# Altium PCB Mixed Signal Board Project.PcbDoc (part 2 of 3)
Units mm, origin at the board's own origin, x right, y up, seen from the top; angles counter-clockwise.
Board outline 70.64 x 70.03 mm, 4 copper layers (Top Layer, GND, VCC, Bottom Layer), stack 1.565 mm thick; 188 components, 143 nets, 738 pads, 458 vias.
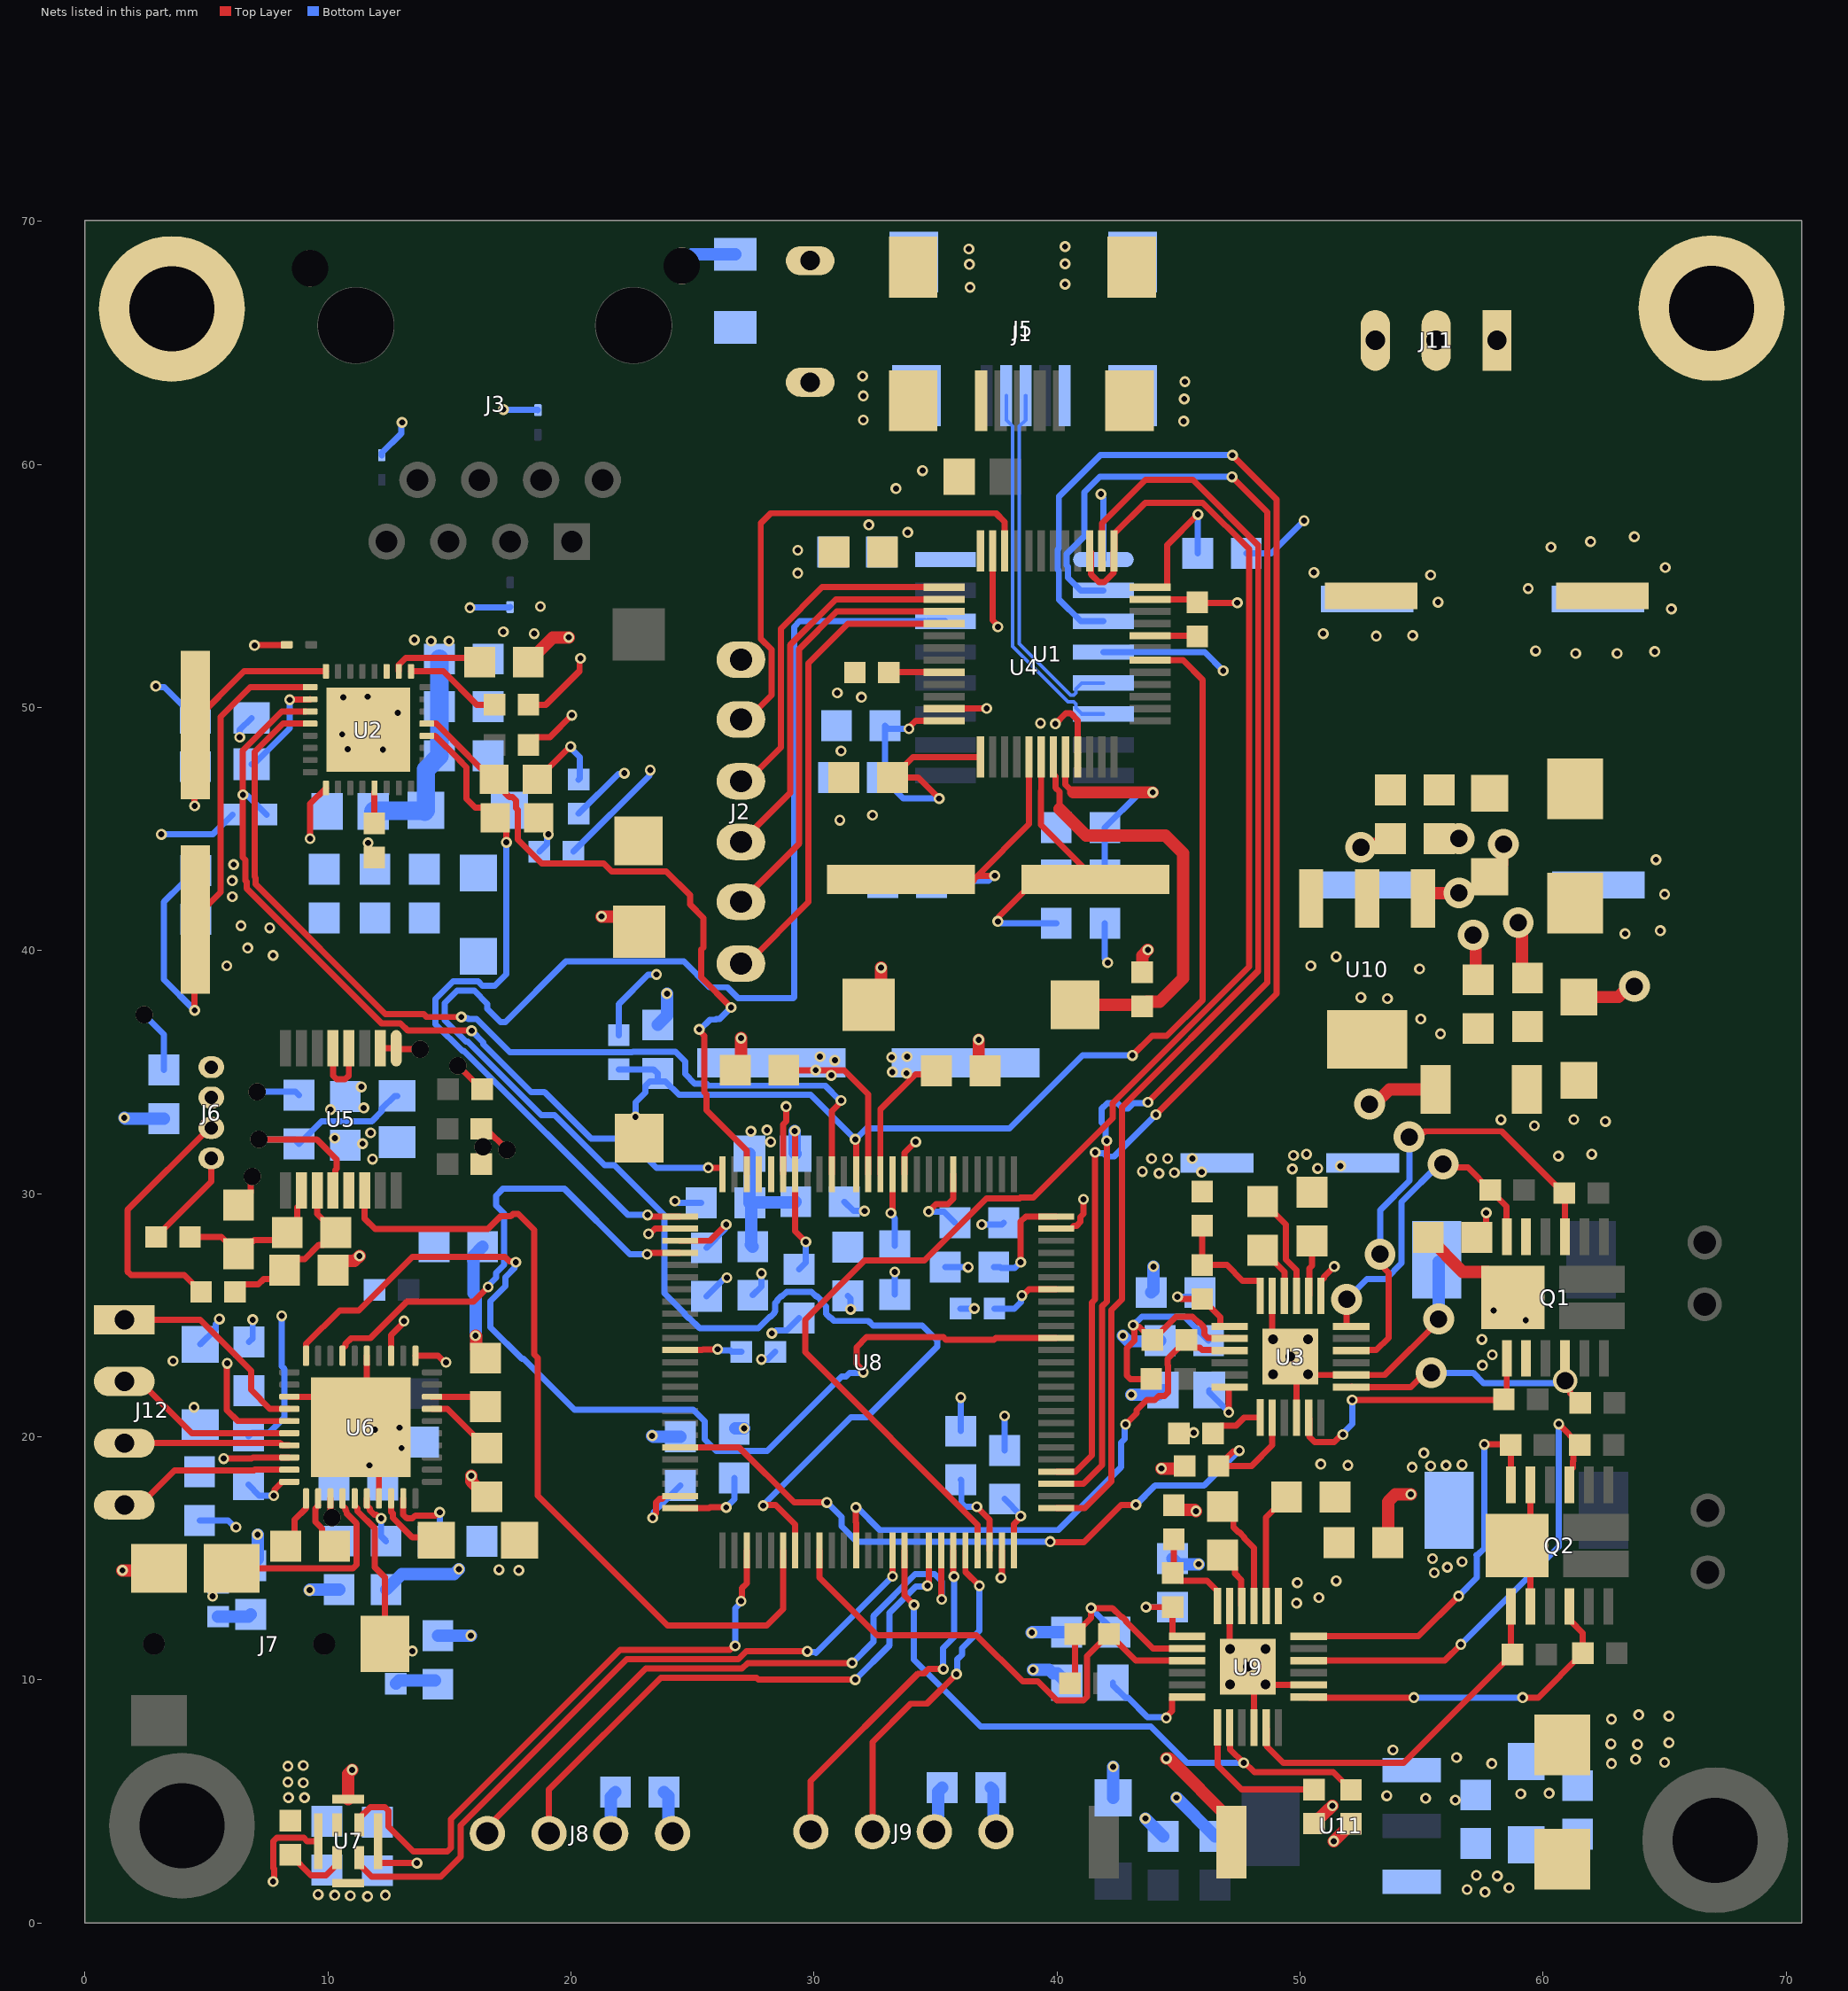
[diagram p4: the nets of this part, all layers, seen from the top]

## Via types
v1: diameter 0.45, hole 0.25, Top Layer to Bottom Layer, tented both sides, 409 vias
v2: diameter 1.27, hole 0.711, Top Layer to Bottom Layer, tented both sides, 15 vias
v3: diameter 0.45, hole 0.25, Top Layer to Bottom Layer, 14 vias
v4: diameter 0.8, hole 0.4, Top Layer to Bottom Layer, tented both sides, 10 vias
v5: diameter 0.711, hole 0.711, Top Layer to Bottom Layer, tented both sides, 9 vias
v6: diameter 1, hole 0.711, Top Layer to Bottom Layer, tented both sides, 1 vias

## Nets (pads, with @x,y where several pads share a name; then routed paths per layer and width w, separated by ;. In a path a pad name is that pad's centre, name@x,y a point inside that pad or via, vN(x,y) a via of type N, cw(c..) or ccw(c..) an arc to the next point about the centre after c; other vN are vias at no path point) (continued)
+3V3: C1.2 C2.2 C3.2 C5.2 C7.2 C8.2 C9.2 C16.2 C17.2 C18.2 C19.2 C28.2 C29.2 C31.2 C44.2 C45.2 C46.2 C47.2 C52.2 C53.2 C54.2 C55.2 C59.2 C60.2 C61.2 C62.2 C63.2 C64.2 C71.2 C81.2 C82.1 C83.2 D6.K FB1.1 FB2.1 FB4.1 J6.3 J8.3 J9.3 R2.2 R3.1 R5.2 R8.1 R9.2 R10.2 R20.1 R25.2 R26.2 R27.1 R32.2 R33.1 R35.2 R44.1 U1.1 U1.9 U1.24 U1.36 U1.48 U2.17 U4.4 U4.16 U5.13 U6.5 U6.8 U6.33 U7.1 U8.6 U8.11 U8.19 U8.28 U8.50 U8.75 U8.100 U10.2 U10.4 | length 90.3
  Top Layer w0.254: v1(5.715,19.101) 6.866,19.101 6.911,19.146 U6.8@8.419,19.146 ; v1(5.863,23.02) 5.85,23.007 5.85,21.099 6.303,20.646 U6.5@8.419,20.646 ; v1(9.271,44.602) 9.271,46.034 U2.17@9.922,46.685 ; v1(11.659,44.428) 11.659,44.082 R9.2@11.913,43.828 ; U6.33@12.604,23.624 12.604,24.182 13.132,24.71 v1(13.132,24.759) ; v5(15.347,35.261) 15.374,35.261 R27.1@16.345,34.29 ; R25.2@16.32,31.217 16.383,31.28 v5(16.383,31.928) ; R26.2@16.32,32.664 16.509,32.664 17.372,31.801 v5(17.374,31.801) ; R5.2@18.253,48.463 18.571,48.781 19.139,48.781 v1(20.041,49.682) ; R8.1@18.253,50.114 18.974,50.114 20.359,51.499 20.359,51.982 v1(20.396,52.019) ; U8.50@24.495,17.063 25.687,17.063 25.718,17.094 v1(26.391,17.094) ; U8.28@24.495,28.063 25.726,28.063 v1(26.391,28.727) ; v1(29.212,32.577) 29.233,32.556 29.233,28.451 v1(29.667,28.016) ; v1(33.166,29.204) 33.166,29.257 33.233,29.323 U8.11@33.233,30.801 ; v1(33.909,49.124) 33.909,49.174 34.182,49.447 U1.48@35.361,49.447 ; v1(34.722,29.261) 35.027,29.566 35.509,29.566 35.733,29.789 U8.6@35.733,30.801 ; v1(35.154,46.253) 34.29,47.117 C3.2@33.233,47.117 34.075,47.959 U1.1@36.849,47.959 ; U8.75@38.233,15.325 38.233,16.412 38.506,16.686 v1(38.506,16.739) ; v1(38.506,27.178) 38.506,28.854 38.715,29.063 U8.100@39.971,29.063 ; v1(39.931,49.327) 40.358,49.754 40.568,49.754 40.849,49.474 U1.9@40.849,47.959 ; U1.24@43.837,54.947 44.512,54.947 44.535,54.97 44.535,56.676 v1(45.798,57.939) ; R20.1@45.022,20.142 45.047,20.168 v1(45.622,20.168)
  Top Layer w0.508: R3.1@43.51,39.103 43.51,39.791 43.739,40.02 v1(43.739,40.03) ; R44.1@50.571,4.089 51.143,4.661 51.174,4.661 v1(51.333,4.82)
  Bottom Layer w0.254: v1(3.15,44.78) 5.27,44.78 R10.2@6.083,45.593 ; R35.2@21.971,36.513 21.971,37.795 23.181,39.005 23.511,39.005 v1(23.52,39.014) ; C62.2@25.578,27.772 26.353,28.547 26.353,28.69 v1(26.391,28.727) ; v1(26.391,17.094) 26.721,17.424 C61.2@26.721,18.304 ; C63.2@29.388,26.883 29.667,27.162 v1(29.667,28.016) ; v1(33.166,29.204) 33.166,29.151 33.325,28.992 C64.2@33.325,27.848 ; v1(33.909,49.124) 33.055,49.124 C1.2@32.928,49.251 32.928,47.235 C2.2@32.81,47.117 33.674,46.253 v1(35.154,46.253) ; v1(34.722,29.261) 35.347,29.261 C71.2@35.805,28.804 ; C59.2@37.398,26.975 37.668,26.975 37.694,26.949 38.267,26.949 38.496,27.178 v1(38.506,27.178) ; C60.2@37.846,17.44 38.506,16.78 v1(38.506,16.739) ; U4.4@41.909,52.274 46.075,52.274 v1(46.838,51.511) ; C9.2@45.787,56.337 45.798,56.348 v1(45.798,57.939)
  Bottom Layer w0.508: v1(1.626,33.122) 1.66,33.087 C29.2@3.251,33.087 ; J8.3@21.641,3.683 21.641,5.191 C55.2@21.835,5.385 ; v1(29.212,32.577) 29.212,31.682 FB4.1@29.246,31.648 ; J9.3@34.95,3.759 35.111,3.92 35.111,5.402 C54.2@35.271,5.563
  other v1: 8.382,5.156 9.042,5.156 8.992,5.766 8.357,5.791 8.357,6.452 8.992,6.477 4.496,21.209 3.632,23.114 11.836,31.42 60.63,31.547 62.001,31.623 11.43,32.055 11.76,32.501 59.639,32.791 62.56,32.969 58.268,33.043 61.265,33.045 6.071,42.215 6.067,42.875 6.125,43.536 39.319,49.352 33.858,57.201 32.258,57.509 33.376,59.004 34.468,59.741
  other v3: 10.287,32.283 55.778,36.576 54.966,37.186 53.594,38.024 52.502,38.075
+12V: C22.1 C24.2 C25.1 C72.1 C74.2 C78.1 C79.1 C80.1 D5.A D7.A J11.1 Q1.2 Q1.11 Q1.15 Q2.2 Q2.11 Q2.15 U3.1 U9.1 | length 11.4
  Top Layer w0.254: U3.1@50.856,25.792 50.856,26.392 50.981,26.517 50.981,26.572 v1(51.41,27) ; Q2.2@59.481,13.019 59.481,14.969 Q2.15@58.931,15.519 59.481,16.069 Q2.11@59.481,18.019
  Top Layer w0.508: C24.2@55.277,28.194 56.695,26.776 57.707,26.776 Q1.15@58.753,25.73
  other v1: 62.814,6.553 64.999,6.604 63.805,6.731 63.881,7.341 62.789,7.366 65.176,7.417 62.814,8.382 65.176,8.509 63.932,8.56 49.86,13.157 50.775,13.386 49.886,13.995 51.486,14.072 56.058,14.63 56.667,14.859 51.968,18.821 50.851,18.872 57.506,22.936 57.912,23.368 57.48,24.003 59.284,24.79 57.963,25.197 49.682,31.013 50.724,31.039 51.664,31.14 49.733,31.572 50.267,31.623 63.373,40.691 64.821,40.818 64.999,42.316 64.643,43.739 61.341,52.222 63.043,52.222 64.592,52.299 59.69,52.324 65.278,54.051 59.385,54.889 65.024,55.753 60.325,56.591 61.951,56.82 63.754,57.023
  other v3: 55.524,14.402 55.448,14.986
AIN0: J6.2 R28.2 | length 10.8
  Top Layer w0.254: R28.2@4.788,25.959 4.095,26.652 1.901,26.652 1.753,26.8 1.753,29.325 5.132,32.704 J6.2@5.207,32.704
AIN1: J6.1 R29.2 | length 4.2
  Top Layer w0.254: R29.2@2.896,28.219 R29.2@2.934,28.219 5.207,30.493 J6.1@5.207,31.454
CAN_RX: J9.1 U8.70 | length 14.5
  Top Layer w0.254: J9.1@29.87,3.759 29.87,5.846 34.283,10.258 34.529,10.258 34.714,10.444 v1(35.327,10.444) ; U8.70@35.733,15.325 35.733,14.28 v1(35.763,14.249)
  Bottom Layer w0.254: v1(35.327,10.444) 35.309,10.462 35.309,11.306 35.763,11.76 v1(35.763,14.249)
CAN_TX: J9.2 U8.71 | length 14
  Top Layer w0.254: J9.2@32.41,3.759 32.41,7.448 33.981,9.019 34.647,9.019 v1(35.865,10.236) ; U8.71@36.233,15.325 36.233,14.44 v1(36.805,13.868)
  Bottom Layer w0.254: v1(35.865,10.236) 35.9,10.271 35.9,10.842 36.096,11.038 36.096,11.306 36.805,12.014 v1(36.805,13.868)
CH340_RST: U4.14 U8.57 | length 81.4
  Top Layer w0.254: v1(27.915,17.164) 27.947,17.196 28.423,17.196 29.233,16.386 U8.57@29.233,15.325
  Bottom Layer w0.254: v1(27.915,17.164) 27.915,17.196 31.521,20.803 32.169,20.803 35.074,23.707 35.074,23.956 34.452,24.578 32.427,24.578 32.24,24.765 30.836,24.765 30.692,24.908 30.654,24.908 30.505,25.057 30.505,25.356 30.277,25.585 30.277,25.623 30.128,25.772 30.09,25.772 29.903,25.959 28.873,25.959 28.686,25.772 28.648,25.772 28.499,25.623 28.499,25.585 28.41,25.496 28.41,25.159 28.372,25.12 28.372,25.082 28.223,24.933 28.185,24.933 27.712,24.46 25.298,24.46 24.876,24.883 24.838,24.883 24.689,25.031 24.689,25.07 23.851,25.908 23.851,29.11 21.793,31.167 21.389,31.167 19.331,33.224 18.784,33.224 15.757,36.251 15.691,36.251 14.812,37.131 14.812,37.843 15.316,38.347 16.028,38.347 16.564,37.811 16.564,37.6 17.1,37.063 17.311,37.063 19.794,39.546 24.644,39.546 25.703,38.488 26.438,38.488 26.876,38.049 29.159,38.049 29.185,38.075 29.185,53.315 29.414,53.544 34.569,53.544 34.62,53.492 34.671,53.544 U4.14@35.409,53.544
CH340_RXD: U4.3 U8.79 | length 61.8
  Top Layer w0.254: U8.79@39.971,18.563 40.763,18.563 41.434,19.234 41.434,25.513 41.569,25.648 v1(41.569,31.697) ; v1(44.069,33.249) 49.041,38.22 49.041,58.554 v1(47.219,60.376)
  Bottom Layer w0.254: v1(41.569,31.697) 41.607,31.66 41.915,31.66 42.048,31.527 42.347,31.527 v1(44.069,33.249) ; U4.3@41.909,53.544 40.976,53.544 40.078,54.442 40.078,55.635 40.024,55.689 40.024,56.478 40.078,56.532 40.078,58.67 41.783,60.376 v1(47.219,60.376)
CH340_TXD: U4.2 U8.78 | length 59.5
  Top Layer w0.254: U8.78@39.971,18.063 41.089,18.063 41.853,18.827 41.853,25.367 42.048,25.563 42.048,32.17 v1(42.046,32.173) ; v1(43.739,33.757) 48.66,38.677 48.66,58.028 v1(47.2,59.488)
  Bottom Layer w0.254: U4.2@41.909,54.814 40.976,54.814 40.459,55.331 40.459,55.793 40.405,55.847 40.405,56.32 41.124,57.04 41.124,58.854 41.759,59.488 v1(47.2,59.488) ; v1(42.046,32.173) 42.008,32.211 42.008,32.741 41.834,32.915 41.834,33.495 42.068,33.729 42.487,33.729 42.715,33.5 42.926,33.5 43.144,33.719 43.701,33.719 v1(43.739,33.757)
CH340USB_D_N: J5.2 U4.6 | length 15.4
  Bottom Layer w0.15: J5.2@37.912,62.826 37.912,61.826 38.173,61.564 38.173,52.505 40.449,50.23 40.688,50.23 40.775,50.142 40.775,49.976 41.018,49.734 U4.6@41.909,49.734
CH340USB_D_P: J5.3 U4.5 | length 15
  Bottom Layer w0.15: J5.3@38.712,62.826 38.712,61.826 38.45,61.564 38.45,52.62 40.563,50.507 40.688,50.507 40.775,50.595 40.775,50.761 41.018,51.004 U4.5@41.909,51.004
CLK_MIC: U7.3 U8.65 | length 29.4
  Top Layer w0.254: U7.3@11.289,2.692 11.362,2.619 11.362,2.344 11.801,1.905 14.648,1.905 15.466,2.723 15.468,2.725 15.468,4.013 22.301,10.846 26.887,10.846 27.214,11.172 v1(29.725,11.172) ; v1(33.233,14.259) U8.65@33.233,15.325
  Bottom Layer w0.254: v1(29.725,11.172) 29.763,11.135 30.052,11.135 30.081,11.107 v1(33.233,14.259)
COL: DS1.A U2.28 U8.26 | length 28.6
  Top Layer w0.254: U2.28@14.245,48.833 14.417,48.833 15.388,47.862 15.388,47.856 15.703,47.54 15.703,46.247 16.072,45.878 16.479,45.878 DS1.A@16.891,45.466 ; v1(17.348,44.45) DS1.A@17.348,45.009 ; v1(23.158,29.125) 23.211,29.125 23.273,29.063 U8.26@24.495,29.063
  Bottom Layer w0.254: v1(17.348,44.45) 17.348,39.029 16.869,38.549 16.365,38.549 16.186,38.728 15.158,38.728 14.431,38.001 14.431,36.973 15.533,35.87 15.599,35.87 22.345,29.125 v1(23.158,29.125)
CRS: DS2.A U2.29 U8.23 | length 28.4
  Top Layer w0.254: U2.29@14.245,49.333 14.456,49.333 15.769,48.02 15.769,48.013 16.268,47.514 16.367,47.514 16.791,47.09 16.791,46.991 16.89,46.991 17.313,46.568 17.313,46.469 17.462,46.32 17.596,46.32 17.745,46.171 17.745,45.857 17.815,45.787 17.815,44.567 18.796,43.586 21.348,43.586 21.679,43.256 23.924,43.256 24.9,42.279 24.9,41.896 25.449,41.347 25.449,40.122 25.365,40.038 25.365,38.891 26.591,37.665 v1(26.591,37.657) ; v1(25.277,36.758) 25.277,36.705 25.492,36.49 25.492,34.179 25.585,34.087 25.585,33.425 27.233,31.777 U8.23@27.233,30.801
  Bottom Layer w0.254: v1(25.277,36.758) 25.33,36.758 25.73,37.158 25.956,37.158 25.984,37.185 26.119,37.185 v1(26.591,37.657)
DOUT_MIC: U7.4 U8.53 | length 25.4
  Top Layer w0.254: U7.4@11.289,4.042 11.289,4.317 11.743,4.771 12.344,4.771 12.493,4.623 12.493,3.967 13.516,2.943 14.913,2.943 15.062,3.092 15.062,4.267 22.022,11.227 26.538,11.227 26.707,11.396 v1(26.76,11.396) ; v1(27,13.237) 27.038,13.275 27.038,13.775 27.233,13.97 U8.53@27.233,15.325
  Bottom Layer w0.254: v1(26.76,11.396) 26.76,12.944 27,13.184 v1(27,13.237)
DRDY: U5.14 U8.56 | length 34.8
  Top Layer w0.254: U5.14@11.514,30.129 11.514,28.973 11.942,28.545 16.586,28.545 17.124,29.083 17.533,29.083 17.622,29.172 17.832,29.172 18.491,28.513 18.491,23.396 18.644,23.243 18.644,17.569 23.984,12.229 28.053,12.229 28.733,12.908 U8.56@28.733,15.325
DVDD: C27.2 R15.2 R16.2 U3.8 | length 12.1
  Top Layer w0.254: v1@43.091,24.524 43.383,24.524 R16.2@43.929,23.978 44.894,24.943 45.571,24.943 45.838,24.676 45.876,24.676 46.025,24.527 46.025,24.489 46.063,24.45 46.063,24.214 46.212,24.065 47.083,24.065 U3.8@47.106,24.042 ; v1(43.136,24.592) 43.173,24.554 43.173,24.375 43.192,24.356 43.192,23.959 42.87,23.638 42.87,22.516 43.019,22.367 43.868,22.367 R15.2@43.878,22.377
  Bottom Layer w0.254: v1(43.136,24.592) 43.487,24.943 45.247,24.943 C27.2@46.237,23.952
DVDD_2: C77.2 R39.2 R40.2 U9.8 | length 9.5
  Top Layer w0.254: R39.2@40.538,9.855 40.742,10.058 R40.2@40.742,11.887 41.402,12.548 v1(41.402,12.954) 42.282,12.954 42.65,12.586 42.688,12.586 42.837,12.437 42.837,12.399 43.945,11.291 U9.8@45.354,11.291
  Bottom Layer w0.254: v1(41.402,12.954) C77.2@42.393,11.963
EARTH: C21.1 J11.2 MH1.1 MH4.1 R12.2
EN: R22.2 U3.14 U8.45 | length 31.3
  Top Layer w0.254: U8.45@24.495,19.563 26.919,19.563 29.186,17.296 v1(30.531,17.297) v1(30.531,17.297) ; v1(39.724,15.684) 39.751,15.657 41.108,15.657 42.643,17.193 43.239,17.193 v3(43.249,17.203) ; R22.2@46.609,18.771 46.609,18.834 R22.2@46.647,18.796 ; v3(47.498,19.431) 47.46,19.393 47.245,19.393 R22.2@46.647,18.796 ; U3.14@48.856,20.788 48.856,19.646 48.006,18.796 R22.2@46.647,18.796
  Bottom Layer w0.254: v1(30.531,17.297) 31.132,16.696 31.132,16.319 31.768,15.684 v1(39.724,15.684) ; v3(43.249,17.203) 44.033,17.987 46.054,17.987 v3(47.498,19.431)
EN_2: R46.2 U8.66 U9.14 | length 26.6
  Top Layer w0.254: U8.66@33.733,15.325 33.733,13.481 34.116,13.097 v1(34.116,13.082) ; U9.14@47.104,8.037 47.127,8.014 47.127,7.139 v1(47.681,6.584) ; v1@47.691,6.652 47.691,6.628 48.121,6.198 51.372,6.198 R46.2@52.095,5.474
  Bottom Layer w0.254: v1(34.116,13.082) 34.112,13.078 34.112,10.826 36.86,8.079 43.862,8.079 45.357,6.584 v1(47.681,6.584)
EXT_UART_RX: J8.1 U8.69 | length 26.8
  Top Layer w0.254: J8.1@16.561,3.683 16.561,3.937 23.089,10.465 27.045,10.465 27.274,10.693 v1(31.572,10.693) ; U8.69@35.233,15.325 35.233,13.332 v1(35.255,13.31)
  Bottom Layer w0.254: v1(31.572,10.693) 32.442,11.563 32.442,12.624 34.169,14.351 34.966,14.351 35.255,14.062 v1(35.255,13.31)
EXT_UART_TX: J8.2 U8.68 | length 23.2
  Top Layer w0.254: J8.2@19.101,3.683 19.101,5.486 23.698,10.084 27.634,10.084 27.71,10.008 v1(31.699,10.008) ; v1(34.671,13.872) 34.733,13.933 U8.68@34.733,15.325
  Bottom Layer w0.254: v1(31.699,10.008) 33.115,11.423 33.115,12.758 34.191,13.834 34.633,13.834 v1(34.671,13.872)
GH1: Q1.1 R17.2 U3.17 | length 12
  Top Layer w0.254: U3.17@50.356,20.788 50.379,20.765 50.379,20.006 50.601,19.784 51.405,19.784 51.712,20.091 v3(51.765,20.091) ; v3(52.146,21.51) 58.353,21.51 R17.2@58.382,21.539 58.503,21.66 Q1.1@58.503,23.23
  Bottom Layer w0.254: v3(51.765,20.091) 51.765,20.144 52.146,20.525 v3(52.146,21.51)
GH1_2: Q2.1 R41.2 U9.17 | length 15
  Top Layer w0.254: U9.17@48.604,8.037 48.627,8.014 48.627,7.253 49.301,6.579 54.267,6.579 R41.2@58.737,11.049 58.681,11.106 Q2.1@58.681,13.019
GH2: Q1.12 R19.2 U3.24 | length 13.6
  Top Layer w0.254: v2(51.918,25.654) 51.918,24.565 51.941,24.542 U3.24@52.106,24.542 ; v2(55.884,31.217) 56.028,31.073 56.9,31.073 R19.2@57.823,30.15 58.496,29.477 58.496,28.237 Q1.12@58.503,28.23
  Bottom Layer w0.254: v2(51.918,25.654) 52.758,26.494 53.532,26.494 54.178,27.14 54.178,29.662 55.733,31.217 v2(55.884,31.217)
GH2_2: Q2.12 R43.2 U9.24 | length 16.2
  Top Layer w0.254: U9.24@50.354,11.791 54.865,11.791 v1(56.523,13.449) ; v1(57.582,19.685) 58.655,19.685 58.681,19.66 Q2.12@58.681,18.019
  Bottom Layer w0.254: v1(56.523,13.449) 57.279,14.204 57.279,15.052 ; 57.255,15.126 57.299,15.126 57.582,15.408 v1(57.582,19.685)
GL1: Q1.4 R21.2 U3.19 | length 11.4
  Top Layer w0.254: U3.19@52.129,22.065 52.106,22.065 52.129,22.042 54.55,22.042 55.14,22.631 v2(55.397,22.631) ; v6(60.903,22.298) Q1.4@60.903,23.23 ; v6@60.933,22.328 60.933,22.066 61.108,21.891 61.108,21.81 R21.2@61.531,21.387
  Bottom Layer w0.254: v2(55.397,22.631) 57.12,22.631 57.546,22.205 60.81,22.205 v6(60.903,22.298)
GL1_2: Q2.4 R45.2 U9.19 | length 14.2
  Top Layer w0.254: U9.19@50.354,9.291 50.377,9.268 v1(54.683,9.268) ; v1(59.16,9.268) 59.801,9.268 R45.2@61.633,11.1 61.633,11.925 61.162,12.396 61.154,12.396 61.081,12.469 Q2.4@61.081,13.019
  Bottom Layer w0.254: v1(54.683,9.268) v1(59.16,9.268)
GL2: Q1.9 R24.2 U3.22 | length 20
  Top Layer w0.254: U3.22@52.104,23.54 U3.22@52.106,23.542 52.129,23.565 53.141,23.565 53.643,24.067 53.643,26.741 53.484,26.901 53.484,27.314 v2(53.289,27.508) ; v2(54.485,32.332) 54.68,32.526 55.104,32.526 55.142,32.564 58.291,32.564 60.516,30.34 60.554,30.34 R24.2@60.871,30.023 60.903,29.991 Q1.9@60.903,28.23
  Bottom Layer w0.254: v2(53.289,27.508) 53.292,27.511 53.292,29.32 54.504,30.532 54.504,32.313 v2(54.485,32.332)
GL2_2: Q2.9 R48.2 U9.22 | length 20.3
  Top Layer w0.254: U9.22@50.354,10.791 55.952,10.791 v1(56.617,11.455) ; v1(60.642,20.523) R48.2@61.506,19.66 61.243,19.397 61.243,19.003 61.233,18.992 61.233,18.721 61.081,18.569 Q2.9@61.081,18.019
  Bottom Layer w0.254: v1(56.617,11.455) 60.642,15.481 v1(60.642,20.523)
GND: C1.1 C2.1 C3.1 C4.1 C5.1 C6.1 C7.1 C8.1 C9.1 C10.1 C11.1 C12.1 C13.1 C14.1 C15.1 C16.1 C17.1 C18.1 C19.1 C20.1 C24.1 C25.2 C26.1 C27.1 C28.1 C29.1 C30.1 C31.1 C33.2 C34.2 C35.1 C36.1 C37.1 C38.2 C39.1 C40.1 C41.2 C43.2 C44.1 C45.1 C46.1 C47.1 C48.1 C49.1 C50.2 C51.2 C52.1 C53.1 C54.1 C55.1 C56.1 C57.1 C58.1 C59.1 C60.1 C61.1 C62.1 C63.1 C64.1 C65.1 C66.1 C67.1 C68.1 C69.1 C70.1 C71.1 C74.1 C76.1 C77.1 C78.2 C79.2 C80.2 C81.1 C82.2 C83.1 C84.1 C85.2 C86.1 C87.1 C88.2 C89.1 C90.1 C91.2 C92.1 D1.A D2.A D3.A D4.A D6.A D8.A J1.5 J1.6 J2.6 J5.5 J5.6 J6.4 J7.1 J8.4 J9.4 J11.3 R1.1 R4.1 R6.1 R7.1 R11.1 R14.2 R18.1 R22.1 R23.2 R34.1 R36.2 R38.2 R42.1 R46.1 R47.2 SW1.2 SW2.1 SW3.2 U1.8 U1.23 U1.35 U1.47 U2.33 U3.5 U3.16 U3.20 U3.25 U4.1 U5.1 U5.2 U5.4 U5.5 U6.3 U6.17 U6.31 U6.35 U6.41 U7.5 U8.10 U8.20 U8.27 U8.74 U8.99 U9.5 U9.16 U9.20 U9.25 U10.1 U11.1 | length 194.8
  Top Layer w0.254: C33.2@6.325,29.524 6.833,30.032 6.833,30.658 v5(6.883,30.709) ; v1(6.985,52.553) 6.998,52.565 8.296,52.565 D1.A@8.309,52.578 ; v1(7.747,1.702) 7.747,1.755 7.787,1.795 7.787,2.23 7.76,2.257 7.76,3.356 7.908,3.505 9.008,3.505 9.146,3.367 U7.5@9.614,3.367 ; U6.3@8.419,21.646 10.104,21.646 U6.41@11.354,20.396 ; U5.5@10.214,35.979 10.214,34.848 10.363,34.699 10.715,34.699 10.864,34.848 U5.4@10.864,35.979 ; U6.35@11.604,23.331 11.604,20.646 U6.41@11.354,20.396 ; v1(11.709,18.821) U6.41@11.709,20.041 ; U7.5@12.064,3.367 12.064,2.512 12.112,2.464 v1(13.665,2.464) ; U6.17@12.104,17.461 12.104,19.646 U6.41@11.709,20.041 ; U5.2@12.164,35.979 U5.1@12.814,35.979 12.852,35.941 v5(13.792,35.941) ; U6.31@13.604,23.331 14.542,23.331 14.811,23.062 v1(14.864,23.062) ; v1(23.19,28.346) 23.243,28.346 23.46,28.563 U8.27@24.495,28.563 ; U8.20@28.733,30.801 28.733,32.849 28.854,32.971 v1(28.854,33.582) ; U8.10@33.733,30.801 33.733,31.675 v1(34.188,32.131) ; U1.47@35.361,49.947 35.368,49.954 37.102,49.954 v1(37.109,49.962) ; U1.35@37.349,56.435 37.349,53.586 37.567,53.368 v1(37.567,53.315) ; v1(37.694,14.199) 37.694,14.252 37.733,14.291 U8.74@37.733,15.325 ; U8.99@39.971,28.563 40.581,28.563 40.7,28.682 40.813,28.682 40.962,28.831 40.962,29.036 41.089,29.163 41.089,29.767 v1(41.09,29.769) ; U1.8@40.349,47.959 40.349,46.824 40.665,46.507 ; U1.23@43.837,54.447 45.642,54.447 45.783,54.305 v1(47.419,54.305) ; U9.5@47.104,13.041 47.104,11.291 v4(47.129,11.266) ; U9.16@48.104,8.037 48.104,9.518 48.402,9.816 v4(48.579,9.816) 48.604,9.791 U9.20@50.354,9.791 ; U3.25@48.856,24.042 U3.5@48.856,25.792 ; v4(48.881,22.567) U3.25@50.154,22.567 ; U3.16@49.856,20.788 49.856,22.269 U3.25@50.154,22.567 ; v4(50.331,22.567) U3.25@50.154,22.567 ; U3.25@50.534,22.542 53.484,22.542 55.702,24.76 v2(55.702,24.841) ; C24.1@57.277,28.194 57.658,28.575 v1(57.658,29.21) ; U6.41@11.354,20.396 U6.41@11.709,20.041
  Top Layer w0.508: v1(1.549,14.503) 2.973,14.503 J7.1@3.05,14.581 ; C34.2@10.22,26.848 10.601,27.229 11.1,27.229 v1(11.303,27.432) ; U7.5@10.839,5.092 10.839,6.14 v1(10.998,6.299) ; v1(15.9,18.39) 15.9,18.168 C48.1@16.535,17.533 ; v1(16.078,24.155) 16.104,24.13 16.104,23.615 C49.1@16.485,23.234 ; C10.1@18.247,51.867 19.263,52.883 v1(19.914,52.883) ; v1(21.26,41.402) 22.191,41.402 SW3.2@22.809,40.783 ; C57.1@26.762,35.077 27,35.315 v1(27,36.398) ; SW1.2@32.242,37.77 32.766,38.294 v1(32.766,39.294) ; v1(36.779,36.334) 36.779,35.315 C56.1@37.043,35.052 ; 40.665,46.507 v1(43.942,46.507) ; v1(44.298,18.694) 45.149,18.694 R22.1@45.225,18.771 ; v1(44.501,6.763) 44.616,6.763 47.177,4.202 D8.A@47.177,3.327 ; R38.2@44.806,17.183 44.996,16.993 45.669,16.993 v1(45.72,16.942) ; U3.25@48.856,24.042 v4(48.881,24.017) ; v1(51.384,3.366) R46.1@52.095,4.077 ; v2(52.502,44.247) 52.648,44.393 53.511,44.393 C84.1@53.721,44.602 ; v2(52.857,33.68) 53.064,33.68 53.673,34.29 D6.A@55.58,34.29 ; C74.1@53.603,15.646 53.619,15.662 53.619,17.33 53.917,17.628 v1(54.559,17.628) ; U10.1@55.056,42.143 55.28,42.367 v2(56.54,42.367) ; C86.1@55.728,44.602 v2(56.54,44.602) ; v2(57.125,40.64) 57.226,40.538 57.226,38.897 C81.1@57.328,38.795 ; C85.2@57.805,43.04 58.313,43.548 58.313,44.318 v2(58.369,44.374) ; v2(58.979,41.148) 59.125,41.002 59.125,39.107 C83.1@59.36,38.871 ; C82.2@61.473,38.088 63.104,38.088 63.548,38.532 v2(63.754,38.532)
  Bottom Layer w0.254: v5(2.438,37.363) 3.251,36.551 C29.1@3.251,35.087 ; v1(2.921,50.876) 2.959,50.839 3.273,50.839 C15.1@4.547,49.565 ; C44.1@4.724,16.561 5.891,16.561 6.17,16.281 v1(6.223,16.281) ; C45.1@4.75,23.8 5.385,24.435 5.385,24.636 5.537,24.788 v1(5.537,24.841) ; v1@6.373,41.021 v1(6.426,41.021) ; v1(6.377,48.778) 6.377,49.085 R11.1@6.858,49.566 ; C43.2@6.731,20.025 6.878,20.171 7.598,20.171 8.204,20.777 8.204,22.795 8.103,22.897 v1(8.103,24.968) ; C46.1@6.756,23.895 6.909,24.047 v1(6.909,24.816) ; C38.2@6.833,14.691 C38.2@6.883,14.741 ; v5(7.087,34.188) 8.671,34.188 C30.1@8.814,34.045 ; D2.A@12.217,60.373 12.217,60.468 13.018,61.269 13.018,61.684 v1(13.056,61.722) ; v1(15.85,54.102) 15.864,54.116 17.486,54.116 D3.A@17.501,54.13 ; v1(17.221,62.255) 17.235,62.241 18.629,62.241 D4.A@18.644,62.227 ; R6.1@20.104,44.069 23.229,47.194 23.229,47.384 v1(23.266,47.422) ; R7.1@20.32,45.631 21.946,47.257 22.162,47.257 v1(22.2,47.295) ; v1(24.282,29.693) 24.335,29.693 24.412,29.616 C67.1@25.365,29.616 ; C62.1@25.578,25.772 26.312,26.505 26.378,26.505 v1(26.416,26.543) ; C61.1@26.721,20.304 C61.1@26.762,20.345 ; C69.1@27.483,25.822 27.838,26.178 v1(27.838,26.719) ; v1(27.838,23.183) 28.098,23.183 R34.1@28.41,23.495 ; v1(28.27,24.257) 28.323,24.257 28.441,24.375 28.88,24.375 C63.1@29.388,24.883 ; C68.1@31.251,29.667 31.632,29.286 v1(32.08,29.286) ; C70.1@31.394,25.797 31.509,25.683 v1(31.509,25.244) ; C64.1@33.325,25.848 v1(33.325,26.781) ; C59.1@35.398,26.975 v1(36.347,26.975) ; R36.2@36.03,25.273 v1(36.601,25.273) v1@36.601,25.297 ; C65.1@36.043,20.228 v1(36.043,21.615) ; v1(36.906,28.727) 37.728,28.727 C71.1@37.805,28.804 ; C60.1@37.846,19.44 v1(37.846,20.853) ; v1(41.808,58.776) 41.808,58.723 41.909,58.622 U4.1@41.909,56.084 ; C6.1@41.97,41.123 41.97,39.668 42.088,39.55 v1(42.088,39.497) ; C8.1@41.97,43.104 C7.1@41.97,45.06 43.38,46.47 43.904,46.47 v1(43.942,46.507) ; C9.1@47.787,56.337 48.819,56.337 v1(50.165,57.683) ; R23.2@55.626,27.28 R23.2@55.702,27.203
  Bottom Layer w0.508: C38.2@6.883,14.741 7.112,14.97 v1(7.112,15.977) ; v1(9.246,13.691) 9.262,13.707 C36.1@10.465,13.707 ; C35.1@12.395,13.707 13.04,14.351 15.189,14.351 v1(15.392,14.554) ; C41.2@14.529,11.82 v1(15.884,11.82) ; v1(16.078,24.155) 16.078,25.823 15.991,25.91 15.991,27.437 C47.1@16.367,27.813 ; v1(23.343,20.041) 23.384,19.999 C66.1@24.511,19.999 ; C58.1@23.571,36.941 23.952,37.322 v1(23.952,38.227) ; C55.1@23.835,5.385 24.008,5.212 24.008,3.856 J8.4@24.181,3.683 ; C61.1@26.762,20.345 v1(27.131,20.345) ; C54.1@37.271,5.563 37.381,5.453 37.381,3.869 J9.4@37.49,3.759 ; v1(38.964,11.938) 38.989,11.963 C77.1@40.393,11.963 ; v1(39.014,10.414) 39.675,10.414 39.827,10.262 40.02,10.262 R42.1@40.401,9.881 ; C88.2@42.311,5.144 v1(42.311,6.428) ; v1(42.713,24.158) 42.945,23.926 44.211,23.926 C27.1@44.237,23.952 ; v1(43.062,21.726) 44.169,21.726 R18.1@44.364,21.92 ; v1(43.637,4.299) C89.1@44.374,3.562 ; C26.1@43.882,25.933 43.967,26.019 v1(43.967,27) ; C76.1@44.755,14.992 44.99,14.757 v1(45.825,14.757) ; v1(44.913,5.156) C87.1@46.507,3.562 ; v2(55.702,24.841) R23.2@55.702,27.203
  other v1: 11.633,1.092 10.922,1.118 10.287,1.143 12.37,1.143 9.601,1.168 56.388,5.055 55.169,5.131 53.569,5.232 59.08,5.309 60.249,5.334 57.887,6.553 56.439,6.807 53.823,7.112 17.856,14.503 17.043,14.529 54.61,18.745 55.372,18.796 56.007,18.821 56.667,18.847 55.093,19.329 13.03,19.533 11.938,20.295 12.954,20.371 44.196,30.836 44.831,30.861 45.949,30.886 43.51,30.912 43.891,31.445 44.552,31.445 45.568,31.445 10.109,33.459 11.481,33.528 11.379,34.392 54.915,39.243 5.842,39.37 50.444,39.37 51.486,39.751 7.747,39.802 6.706,40.107 7.609,40.934 31.064,45.364 32.41,45.568 31.115,48.209 12.268,48.26 10.82,48.285 10.592,48.895 12.878,49.784 10.643,50.419 31.953,50.419 11.633,50.444 30.963,50.597 53.137,52.934 54.635,52.959 18.491,53.035 50.952,53.035 17.221,53.111 18.745,54.153 55.677,54.331 55.372,55.448 29.337,55.524 50.571,55.55 29.337,56.464 45.212,61.773 32.029,61.824 45.237,62.687 32.029,62.814 45.263,63.398 32.004,63.627 36.424,67.285 40.335,67.412 36.398,68.224 40.335,68.25 36.373,68.859 40.335,68.961
  other v4: 47.129,9.816 47.854,10.541 48.579,11.266 49.606,23.292 50.331,24.017
INT: R9.1 U2.21 | length 1.3
  Top Layer w0.254: R9.1@11.913,45.225 11.913,46.505 U2.21@11.92,46.512
JTCK/SWCLK_F103: J2.4 U1.37 | length 14.5
  Top Layer w0.254: J2.4@27,46.965 27.25,46.965 28.635,48.35 28.635,53.248 30.334,54.947 U1.37@35.361,54.947
JTCK_F407: U1.26 U8.76 | length 53.2
  Top Layer w0.254: U8.76@39.971,17.063 41.142,17.063 42.234,18.154 42.234,25.209 42.672,25.647 42.672,33.554 48.279,39.161 48.279,56.674 45.593,59.36 43.637,59.36 41.849,57.571 U1.26@41.849,56.435
JTDI_F103: J2.3 U1.38 | length 16.1
  Top Layer w0.254: J2.3@27,44.465 29.016,46.481 29.016,52.567 30.896,54.447 U1.38@35.361,54.447
JTDO_F103: J2.2 U1.39 | length 18
  Top Layer w0.254: J2.2@27,42.005 29.397,44.402 29.397,52.41 30.935,53.947 U1.39@35.361,53.947
JTMS/SWDIO_F103: J2.5 U1.34 | length 20.5
  Top Layer w0.254: J2.5@27,49.505 27.254,49.505 27.254,49.509 28.254,50.509 28.254,52.38 27.813,52.822 27.813,57.585 28.216,57.988 37.49,57.988 37.849,57.63 U1.34@37.849,56.435
JTMS_F407: U1.25 U1.27 U8.72 | length 64.9
  Top Layer w0.254: U8.72@36.733,15.325 36.733,16.379 29.637,23.474 29.637,24.811 32.086,27.26 34.55,27.26 37.099,29.81 38.465,29.81 38.492,29.837 39.031,29.837 42.291,33.096 42.291,33.726 47.898,39.332 47.898,56.516 45.996,58.418 43.631,58.418 42.372,57.158 42.372,56.458 42.326,56.412 42.326,55.534 41.939,55.147 41.729,55.147 41.402,55.474 41.402,56.388 41.355,56.435 U1.27@41.349,56.435
LRCK: U6.40 U8.90 | length 42.6
  Top Layer w0.254: U6.40@9.104,23.331 9.106,23.333 9.106,23.819 10.484,25.197 11.276,25.197 12.379,26.3 12.382,26.3 13.484,27.402 17.282,27.402 17.469,27.216 17.697,27.216 v1(17.735,27.178) ; v1(32.029,22.657) 32.029,22.71 31.753,22.986 31.753,23.686 32.16,24.092 35.326,24.092 35.421,23.997 37.41,23.997 37.475,24.063 U8.90@39.971,24.063
  Bottom Layer w0.254: v1(17.735,27.178) 17.697,27.14 17.697,26.96 17.301,26.564 17.301,26.188 16.691,25.578 16.691,24.505 17.989,23.207 18.055,23.207 20.154,21.107 25.032,21.107 25.506,20.633 25.506,19.889 25.981,19.415 28.082,19.415 31.144,22.477 31.324,22.477 31.466,22.619 31.992,22.619 v1(32.029,22.657)
MCLK: U6.37 U8.29 | length 20.1
  Top Layer w0.254: U6.37@10.606,23.624 10.725,23.743 10.725,23.821 10.957,24.054 11.75,24.054 12.842,25.146 12.845,25.146 13.251,25.552 15.988,25.552 v1(16.597,26.161) ; v1(23.139,27.508) 23.192,27.508 23.247,27.563 U8.29@24.495,27.563
  Bottom Layer w0.254: v1(16.597,26.161) 16.597,26.214 16.92,26.537 16.92,26.737 17.256,27.073 17.256,29.184 16.92,29.52 16.92,29.916 17.201,30.197 19.739,30.197 22.428,27.508 v1(23.139,27.508)
MDC: U2.12 U8.16 | length 39.5
  Top Layer w0.254: U2.12@9.272,49.335 8.151,49.335 6.985,48.169 6.985,43.037 7.036,42.986 7.036,42.723 12.37,37.389 13.945,37.389 14.067,37.267 v1(15.49,37.267) ; U8.16@30.733,30.801 30.733,33.397 31.115,33.78 v1(31.115,33.833)
  Bottom Layer w0.254: v1(15.49,37.267) 15.528,37.229 15.733,37.229 15.781,37.182 16.116,37.182 17.483,35.814 22.521,35.814 22.548,35.841 24.262,35.841 24.273,35.83 24.311,35.83 24.702,35.439 24.702,34.919 25.093,34.528 25.575,34.528 25.661,34.442 30.459,34.442 31.069,33.833 v1(31.115,33.833)
MDIO: R10.1 U2.11 U8.25 | length 35
  Top Layer w0.254: v1(6.506,46.406) 6.506,43.832 6.604,43.734 6.604,42.879 6.655,42.828 6.655,42.565 12.212,37.008 12.988,37.008 13.293,36.703 v1(15.917,36.703) ; v1@6.597,46.406 6.506,46.496 6.506,48.229 8.11,49.833 U2.11@9.099,49.833 ; v1(25.654,31.064) 26.233,31.064 U8.25@26.233,30.801
  Bottom Layer w0.254: v1(6.506,46.406) 6.544,46.368 6.705,46.368 R10.1@7.48,45.593 ; v1(15.917,36.703) 16.399,36.221 16.399,36.148 18.371,34.176 18.918,34.176 20.833,32.262 22.323,32.262 23.52,31.064 v1(25.654,31.064)
NetC4_2: C4.2 U1.5 X1.2 | length 12.4
  Top Layer w0.254: X1.2@33.58,42.926 34.265,42.926 34.624,42.926 X1.2@36.028,42.926 ; X1.2@36.028,42.875 X1.2@36.576,42.875 ; X1.2@36.576,42.926 36.728,43.078 ; v1(37.44,43.078) 36.728,43.078 ; U1.5@38.849,47.959 38.849,45.199 36.728,43.078
  Bottom Layer w0.254: C4.2@34.833,42.799 34.909,42.875 37.183,42.875 37.387,43.078 v1(37.44,43.078)
NetC6_2: C6.2 U1.6 X1.1 | length 13
  Top Layer w0.254: v1(37.567,41.199) 37.604,41.236 37.604,41.398 39.132,42.926 40.763,42.926 X1.1@41.123,42.926 ; U1.6@39.349,47.959 39.349,46.569 39.341,46.561 39.341,45.165 41.221,43.285 41.221,42.926 X1.1@41.58,42.926
  Bottom Layer w0.254: v1(37.567,41.199) 37.62,41.199 37.696,41.123 C6.2@39.97,41.123
NetC10_2: C10.2 U2.2 | length 3.8
  Top Layer w0.254: U2.2@12.922,51.485 12.922,51.751 13.21,52.039 16.074,52.039 C10.2@16.247,51.867
NetC11_2: C11.2 C12.2 C13.2 C14.2 FB1.2 U2.3 | length 8.6
  Bottom Layer w0.762: FB1.2@11.872,45.72 11.895,45.743 13.968,45.743 C11.2@13.991,45.72 ; C11.2@14.037,45.766 14.037,47.447 C12.2@14.596,48.006 C13.2@14.596,50.038 C14.2@14.596,51.994
  other v1: 14.249,52.73 14.986,52.73 13.564,52.781
NetC15_2: C15.2 U2.8 Y1.2 | length 11.4
  Top Layer w0.254: v1(4.521,45.949) 4.521,49.454 6.552,51.485 U2.8@9.922,51.485
  Bottom Layer w0.254: v1(4.521,45.949) 4.521,47.539 C15.2@4.547,47.565
NetC20_2: C20.2 U2.9 Y1.1 | length 23.5
  Top Layer w0.254: v1(4.521,37.541) 4.521,41.251 Y1.1@4.547,41.276 4.547,41.351 5.588,42.393 5.588,49.606 6.817,50.835 U2.9@9.272,50.835
  Bottom Layer w0.254: v1(4.521,37.541) 3.251,38.811 3.251,42.004 3.995,42.748 4.029,42.748 C20.2@4.572,43.291
NetC21_2: C21.2 J3.9 J3.10 R12.1 | length 2.4
  Bottom Layer w0.508: J3.10@24.566,68.165 24.566,68.225 24.973,68.632 R12.1@26.772,68.632
NetC22_2: C22.2 U3.2 | length 2.3
  Top Layer w0.254: U3.2@50.356,25.792 50.378,25.813 50.378,26.923 50.495,27.04 C22.2@50.495,28.058
NetC23_1: C23.1 U3.3 | length 4.5
  Top Layer w0.254: C23.1@48.463,29.677 49.414,28.726 49.414,27.294 49.856,26.852 U3.3@49.856,25.792
NetC23_2: C23.2 U3.4 | length 2.3
  Top Layer w0.254: C23.2@48.463,27.677 49.356,26.784 U3.4@49.356,25.792
NetC26_2: C26.2 R13.1 U3.7 | length 3.9
  Top Layer w0.254: v1(44.958,25.756) 45.011,25.756 45.1,25.667 R13.1@45.974,25.667 46.717,24.924 46.717,24.565 47.083,24.565 U3.7@47.106,24.542
  Bottom Layer w0.254: v1(44.958,25.756) 45.704,25.756 C26.2@45.882,25.933
NetC30_2: C30.2 FB2.2 U5.12 | length 11.5
  Top Layer w0.254: v5(7.163,32.233) 9.551,32.233 10.368,31.415 10.368,31.018 10.312,30.962 10.312,30.227 U5.12@10.214,30.129
  Bottom Layer w0.254: v5(7.163,32.233) 8.626,32.233 C30.2@8.814,32.045 9.749,32.98 11.812,32.98 12.229,33.398 12.229,33.498 12.752,34.021 FB2.2@12.852,34.021
NetC32_1: C32.1 C33.1 R29.1 U5.10 | length 6.6
  Top Layer w0.254: R29.1@4.331,28.219 5.629,28.219 C33.1@6.325,27.524 6.833,28.032 6.921,28.032 6.981,28.092 8.017,28.092 8.743,28.818 8.743,29.274 8.743,29.433 8.914,29.604 U5.10@8.914,30.129
NetC32_2: C32.2 C34.1 R28.1 U5.11 | length 6.7
  Top Layer w0.254: R28.1@6.185,25.959 6.49,26.264 7.137,26.264 7.353,26.479 C34.1@7.852,26.479 ; C34.1@8.22,26.848 8.685,27.313 9.056,27.313 9.642,27.898 9.823,27.898 C32.2@10.331,28.406 9.564,29.173 U5.11@9.564,30.129
NetC35_2: C35.2 C36.2 C37.2 FB3.2 U6.13 U6.16 | length 3
  Top Layer w0.254: U6.13@10.104,17.461 10.106,17.459 10.106,16.741 v5(10.171,16.675) ; U6.16@11.604,17.461 11.604,17.17 11.725,17.049 11.725,16.971 11.909,16.787 11.994,16.787 12.142,16.64 v1(12.195,16.64)
  Bottom Layer w0.254: v1(12.195,16.64) 12.195,15.907 C35.2@12.395,15.707
NetC38_1: C38.1 R30.2 | length 1.4
  Bottom Layer w0.508: R30.2@5.486,12.598 6.74,12.598 C38.1@6.833,12.691
NetC41_1: C41.1 R31.2 | length 1.7
  Bottom Layer w0.508: R31.2@12.802,9.842 12.932,9.973 C41.1@14.402,9.973
NetC42_1: C42.1 U6.11 | length 2.3
  Top Layer w0.254: C42.1@8.271,15.494 8.638,15.861 8.638,16.59 9.104,17.056 U6.11@9.104,17.461
NetC42_2: C42.2 U6.12 | length 2
  Top Layer w0.254: U6.12@9.602,17.168 9.485,17.051 9.485,16.499 9.763,16.221 9.763,16.002 C42.2@10.271,15.494
NetC43_1: C43.1 U6.10 | length 2.2
  Top Layer w0.254: v1(7.772,17.577) 7.81,17.614 7.81,17.828 8.128,18.146 U6.10@8.419,18.146
  Bottom Layer w0.254: C43.1@6.731,18.025 7.179,17.577 v1(7.772,17.577)
NetC48_2: C48.2 U6.27 | length 2.9
  Top Layer w0.254: U6.27@14.289,21.146 14.291,21.144 14.924,21.144 C48.2@16.535,19.533
NetC49_2: C49.2 U6.28 | length 2.4
  Top Layer w0.254: U6.28@14.289,21.646 16.073,21.646 C49.2@16.485,21.234
NetC50_1: C50.1 U6.19 | length 3.6
  Top Layer w0.254: U6.19@13.104,17.461 13.104,16.792 13.253,16.643 13.483,16.643 13.598,16.759 14.42,16.759 14.552,16.891 v1(14.605,16.891)
  Bottom Layer w0.254: C50.1@14.342,15.697 14.605,15.96 v1(14.605,16.891)
NetC51_1: C51.1 U6.18 | length 3
  Top Layer w0.254: U6.18@12.604,17.461 12.606,17.459 12.606,16.906 12.674,16.838 12.674,16.663 13.471,15.866 14.343,15.866 C51.1@14.466,15.743
NetC56_2: C56.2 U8.12 X2.2 | length 5.6
  Top Layer w0.254: U8.12@32.733,30.801 32.733,33.469 34.175,34.912 34.903,34.912 C56.2@35.043,35.052
  other v1: 33.807,34.95 33.223,35.001 33.198,35.611 33.833,35.636
NetC57_2: C57.2 U8.13 X2.1 | length 7.2
  Top Layer w0.254: C57.2@28.762,35.077 v1(30.074,35.077) 31.242,35.077 32.233,34.087 U8.13@32.233,30.801
  other v1: 30.713,34.866 30.861,35.484 30.251,35.636
NetC65_2: C65.2 U8.73 | length 3.7
  Top Layer w0.254: v1(36.703,17.12) 37.233,16.59 U8.73@37.233,15.325
  Bottom Layer w0.254: C65.2@36.043,18.228 36.068,18.202 36.068,17.268 36.217,17.12 v1(36.703,17.12)
NetC66_2: C66.2 U8.49 | length 3.6
  Top Layer w0.254: v1(23.368,16.662) 23.368,16.715 23.503,16.851 23.503,17.295 23.652,17.444 23.765,17.444 23.884,17.563 U8.49@24.495,17.563
  Bottom Layer w0.254: v1(23.368,16.662) 23.406,16.7 23.406,16.894 C66.2@24.511,17.999
NetC67_2: C67.2 C68.2 C69.2 C70.2 FB4.2 U8.21 U8.22 | length 5.8
  Bottom Layer w0.508: FB4.2@27.346,31.648 27.355,31.639 27.355,29.626 C67.2@27.365,29.616 C67.2@27.391,29.642 ; C69.2@27.483,27.822 27.407,27.899 27.424,27.916 27.424,29.608 C67.2@27.391,29.642 ; C68.2@29.251,29.667 29.226,29.642 C67.2@27.391,29.642
  other v1: 28.219,32.131 27.407,32.563 28.067,32.614
NetC72_2: C72.2 U9.2 | length 4.8
  Top Layer w0.254: U9.2@48.604,13.041 48.604,16.685 C72.2@49.444,17.526
NetC73_1: C73.1 U9.3 | length 4.6
  Top Layer w0.254: C73.1@46.812,17.129 47.258,16.683 47.258,16.274 47.461,16.072 47.499,16.072 47.701,15.869 47.701,15.831 48.104,15.429 U9.3@48.104,13.041
NetC73_2: C73.2 U9.4 | length 2.4
  Top Layer w0.254: C73.2@46.812,15.129 47.32,14.621 47.32,14.376 47.581,14.116 47.581,13.064 U9.4@47.604,13.041
NetC76_2: C76.2 R37.1 U9.7 | length 4
  Top Layer w0.254: v1(43.664,12.992) R37.1@44.755,12.992 44.755,11.814 44.778,11.791 U9.7@45.354,11.791
  Bottom Layer w0.254: v1(43.664,12.992) C76.2@44.755,12.992
NetC84_2: C84.2 C85.1 C86.2 D5.K U10.3
NetC90_2: C90.2 C91.1 C92.2 D7.K U11.3
  other v1: 57.607,1.27 56.871,1.372 58.598,1.448 58.115,1.93 57.252,1.956
NetDS1_K: DS1.K R6.2 | length 1.7
  Top Layer w0.254: DS1.K@18.669,45.466 19.075,45.06 v1(19.075,44.78)
  Bottom Layer w0.254: R6.2@18.707,44.069 19.025,44.386 19.025,44.676 19.075,44.727 v1(19.075,44.78)
NetDS2_K: DS2.K R7.2 | length 3.5
  Top Layer w0.254: DS2.K@18.618,47.041 19.964,48.387 v1(19.99,48.387)
  Bottom Layer w0.254: v1(19.99,48.387) 19.99,48.334 20.371,47.953 20.371,47.079 R7.2@20.32,47.028
NetJ7_2: J7.2 R31.1 U6.15 | length 8.2
  Top Layer w0.254: U6.15@11.106,17.168 11.223,17.051 11.223,16.934 11.938,16.219 11.938,14.626 12.35,14.214 J7.2@12.35,11.481 ; J7.2@12.35,11.389 12.557,11.182 v1(13.482,11.182)
  Top Layer w0.508: J7.2@12.35,11.389 J7.2@12.35,11.481
  Bottom Layer w0.254: R31.1@12.802,11.239 12.859,11.182 v1(13.482,11.182)
NetJ7_3: J7.3 R30.1 U6.14 | length 10
  Top Layer w0.254: v1(5.258,13.437) 5.258,13.789 J7.3@6.05,14.581 11.034,14.581 11.183,14.73 11.183,16.436 10.773,16.845 10.773,16.92 10.725,16.968 10.725,17.049 U6.14@10.606,17.168
  Bottom Layer w0.254: v1(5.258,13.437) 5.258,13.767 R30.1@5.486,13.995
NetR1_2: R1.2 U1.44 | length 2.3
  Top Layer w0.254: R1.2@33.096,51.447 U1.44@35.361,51.447
NetR4_2: R4.2 U1.20 | length 1.9
  Top Layer w0.254: U1.20@43.837,52.947 45.745,52.947 R4.2@45.771,52.921
NetR8_2: R8.2 U2.1 | length 4
  Top Layer w0.254: U2.1@13.422,51.485 14.759,51.485 16.129,50.114 R8.2@16.856,50.114
NetR11_2: R11.2 U2.10 | length 4.2
  Top Layer w0.254: v1(8.433,50.317) 8.448,50.333 9.27,50.333 U2.10@9.272,50.335
  Bottom Layer w0.254: R11.2@6.858,47.666 6.958,47.666 8.433,49.14 v1(8.433,50.317)
NetR13_2: R13.2 R14.1 U3.6 | length 4.9
  Top Layer w0.254: R14.1@45.974,28.689 R13.2@45.974,27.064 46.988,27.064 47.637,26.415 48.333,26.415 48.356,26.392 U3.6@48.356,25.792
NetR18_2: R18.2 U3.12 | length 2.3
  Top Layer w0.254: v1(47.066,21.006) 47.066,22.019 47.089,22.042 U3.12@47.106,22.042
  Bottom Layer w0.254: R18.2@46.264,21.92 46.264,21.82 47.066,21.018 v1(47.066,21.006)
NetR20_2: R20.2 U3.13 | length 2.3
  Top Layer w0.254: R20.2@46.364,20.088 R20.2@46.419,20.142 46.736,20.46 47.369,20.46 47.701,20.792 U3.13@48.356,20.792
NetR33_2: R33.2 U7.2 | length 2.7
  Top Layer w0.254: R33.2@8.458,2.807 9.309,1.956 9.927,1.956 10.389,2.417 U7.2@10.389,2.692
NetR34_2: R34.2 U8.37 | length 2.6
  Top Layer w0.254: U8.37@24.495,23.563 25.396,23.563 25.429,23.597 v1(26.035,23.597)
  Bottom Layer w0.254: v1(26.035,23.597) 26.073,23.559 26.555,23.559 26.619,23.495 R34.2@27.013,23.495
NetR36_1: R36.1 U8.94 | length 3
  Top Layer w0.254: v1(38.557,25.806) 38.595,25.806 38.852,26.063 U8.94@39.971,26.063
  Bottom Layer w0.254: R36.1@37.427,25.273 38.252,25.273 38.52,25.54 38.52,25.769 v1(38.557,25.806)
NetR37_2: R37.2 R38.1 U9.6 | length 4.2
  Top Layer w0.254: R38.1@44.806,15.786 44.806,14.44 R37.2@44.755,14.389 45.072,14.072 46.173,14.072 46.604,13.641 U9.6@46.604,13.041
NetR42_2: R42.2 U9.12 | length 4.4
  Top Layer w0.254: v1(44.495,8.433) 44.495,8.486 44.731,8.721 44.731,9.268 44.754,9.291 U9.12@45.354,9.291
  Bottom Layer w0.254: R42.2@42.301,9.881 42.301,9.781 42.824,9.258 42.924,9.258 43.722,8.46 44.468,8.46 v1(44.495,8.433)
NetR44_2: R44.2 U9.13 | length 5.9
  Top Layer w0.254: U9.13@46.604,8.041 46.604,6.482 47.6,5.486 R44.2@50.571,5.486
nFAULT: R16.1 U3.9 U8.62 | length 22.8
  Top Layer w0.254: v1(31.725,17.094) 31.725,16.474 31.733,16.466 U8.62@31.733,15.325 ; v1(42.821,20.511) 43.273,20.963 43.273,21.096 43.69,21.514 44.018,21.514 44.183,21.679 44.428,21.679 44.577,21.828 44.577,22.927 44.55,22.954 44.55,23.201 R16.1@45.326,23.978 45.644,23.66 45.88,23.66 45.975,23.565 47.083,23.565 U3.9@47.106,23.542
  Bottom Layer w0.254: v1(31.725,17.094) 31.775,17.094 32.707,16.163 40.049,16.163 42.637,18.75 42.637,19.765 42.783,19.911 42.783,20.474 v1(42.821,20.511)
nFAULT_2: R40.1 U8.59 U9.9 | length 20.9
  Top Layer w0.254: U8.59@30.233,15.325 30.233,14.207 32.598,11.841 36.684,11.841 38.59,9.935 39.21,9.935 39.989,9.157 41.088,9.157 41.237,9.305 41.237,10.986 R40.1@42.139,11.887 43.235,10.791 U9.9@45.354,10.791
NJTRST_F103: J2.1 U1.40 | length 19.9
  Top Layer w0.254: J2.1@27,39.465 27.25,39.465 29.778,41.993 29.778,51.825 31.4,53.447 U1.40@35.361,53.447
NRST: R3.2 SW1.1 U1.7 | length 18.2
  Top Layer w0.254: U1.7@39.849,47.959 39.849,47.259 39.945,47.163 39.945,46.689 40.107,46.527 40.107,45.822
  Top Layer w0.508: 40.107,45.822 41.199,44.729 44.455,44.729 45.187,43.998 45.187,38.862 44.221,37.897 43.701,37.897 R3.2@43.51,37.706 43.447,37.77 SW1.1@40.742,37.77
NTJRST_F407: C58.2 R35.1 SW3.1 U1.18 U8.14 | length 47.9
  Top Layer w0.254: v1(22.657,33.156) 22.657,32.436 SW3.1@22.809,32.283 ; v1(31.699,32.233) 31.733,32.199 U8.14@31.733,30.801 ; v1(43.104,35.687) 43.91,36.493 44.52,36.493 45.999,37.973 45.999,51.13 45.183,51.947 U1.18@43.837,51.947
  Bottom Layer w0.254: R35.1@21.971,35.116 23.396,35.116 C58.2@23.571,34.941 C58.2@23.571,34.62 ; v1(22.657,33.156) 22.663,33.162 22.663,33.762 23.063,34.163 23.063,34.433 23.25,34.62 C58.2@23.571,34.62 ; v1(43.104,35.687) 41.046,35.687 38.049,32.69 32.156,32.69 v1(31.699,32.233) 29.87,34.061 24.451,34.061 23.892,34.62 C58.2@23.571,34.62
OUTA+: J12.1 U6.4 | length 8.8
  Top Layer w0.254: J12.1@1.626,24.816 4.745,24.816 6.84,22.721 6.84,21.924 7.618,21.146 U6.4@8.419,21.146
OUTA-: J12.2 U6.6 | length 7.7
  Top Layer w0.254: J12.2@1.626,22.276 2.276,22.276 4.405,20.146 U6.6@8.419,20.146
OUTB+: J12.3 U6.7 | length 6.8
  Top Layer w0.254: J12.3@1.626,19.736 8.038,19.736 8.128,19.646 U6.7@8.419,19.646
OUTB-: J12.4 U6.9 | length 7.4
  Top Layer w0.254: J12.4@1.626,17.196 2.276,17.196 3.692,18.613 6.964,18.613 6.997,18.646 U6.9@8.419,18.646